# Altium PCB band.PcbDoc
Units mm, origin at the board's own origin, x right, y up, seen from the top; angles counter-clockwise.
Board outline 70 x 45 mm, 2 copper layers (Top Layer, Bottom Layer); 47 components, 35 nets, 190 pads, 43 vias.
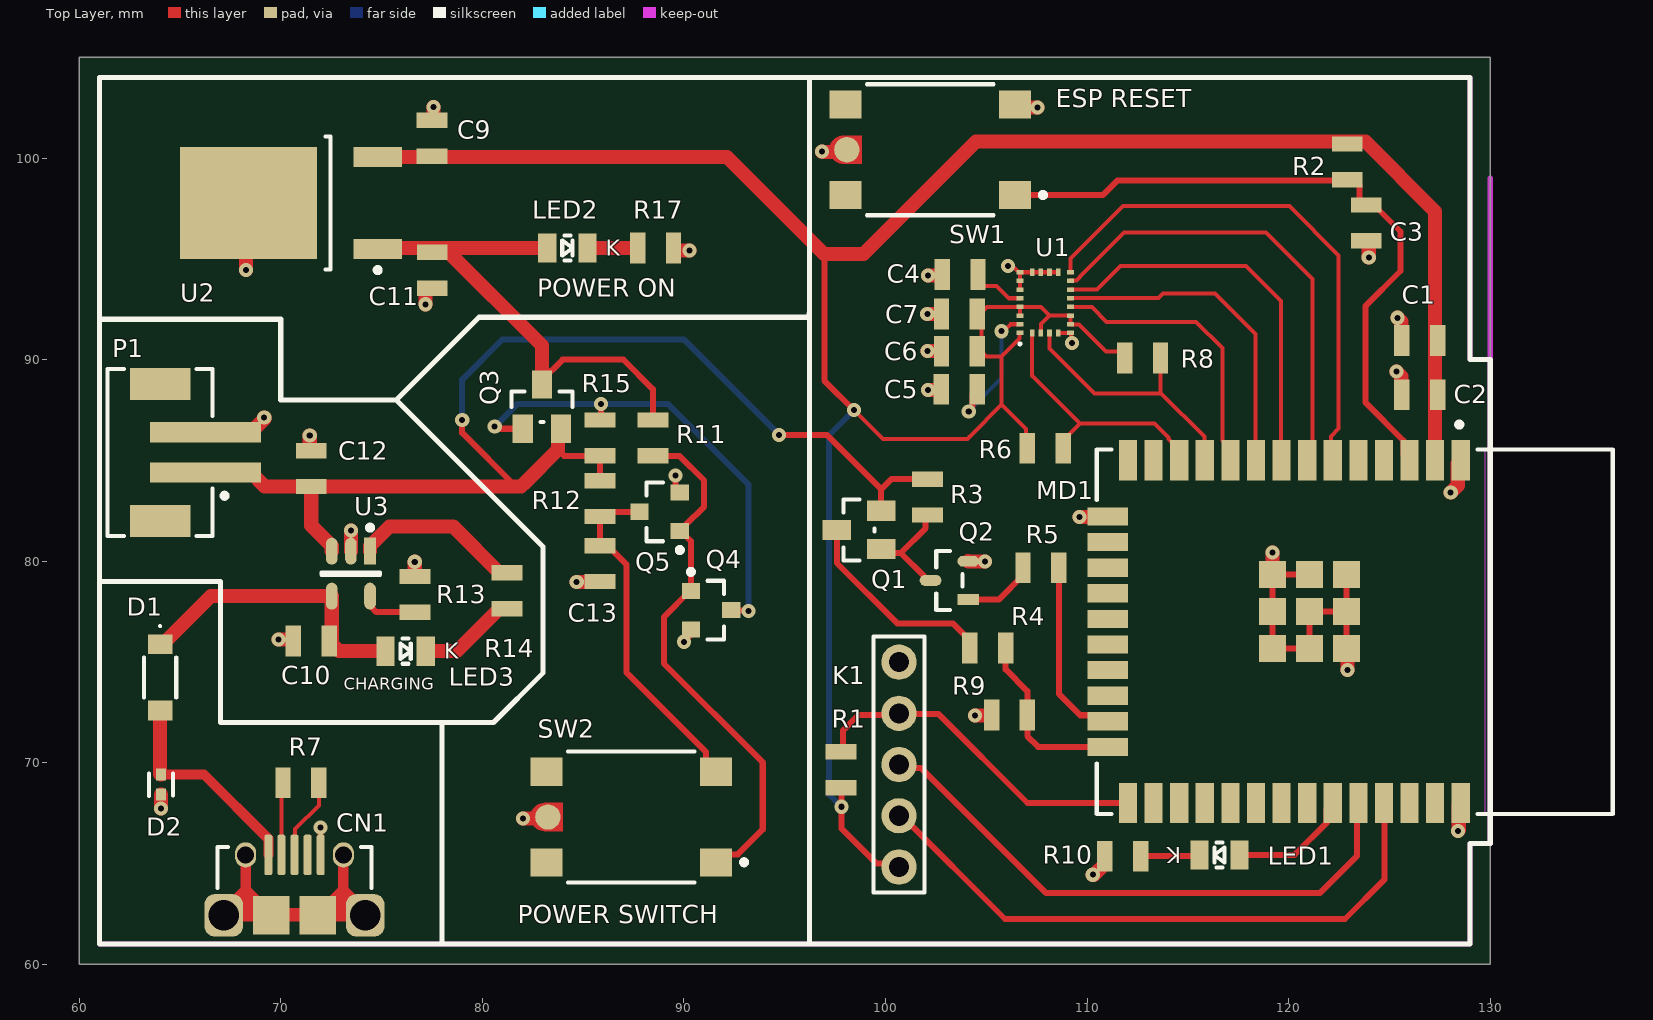
[diagram p0: Top Layer view]
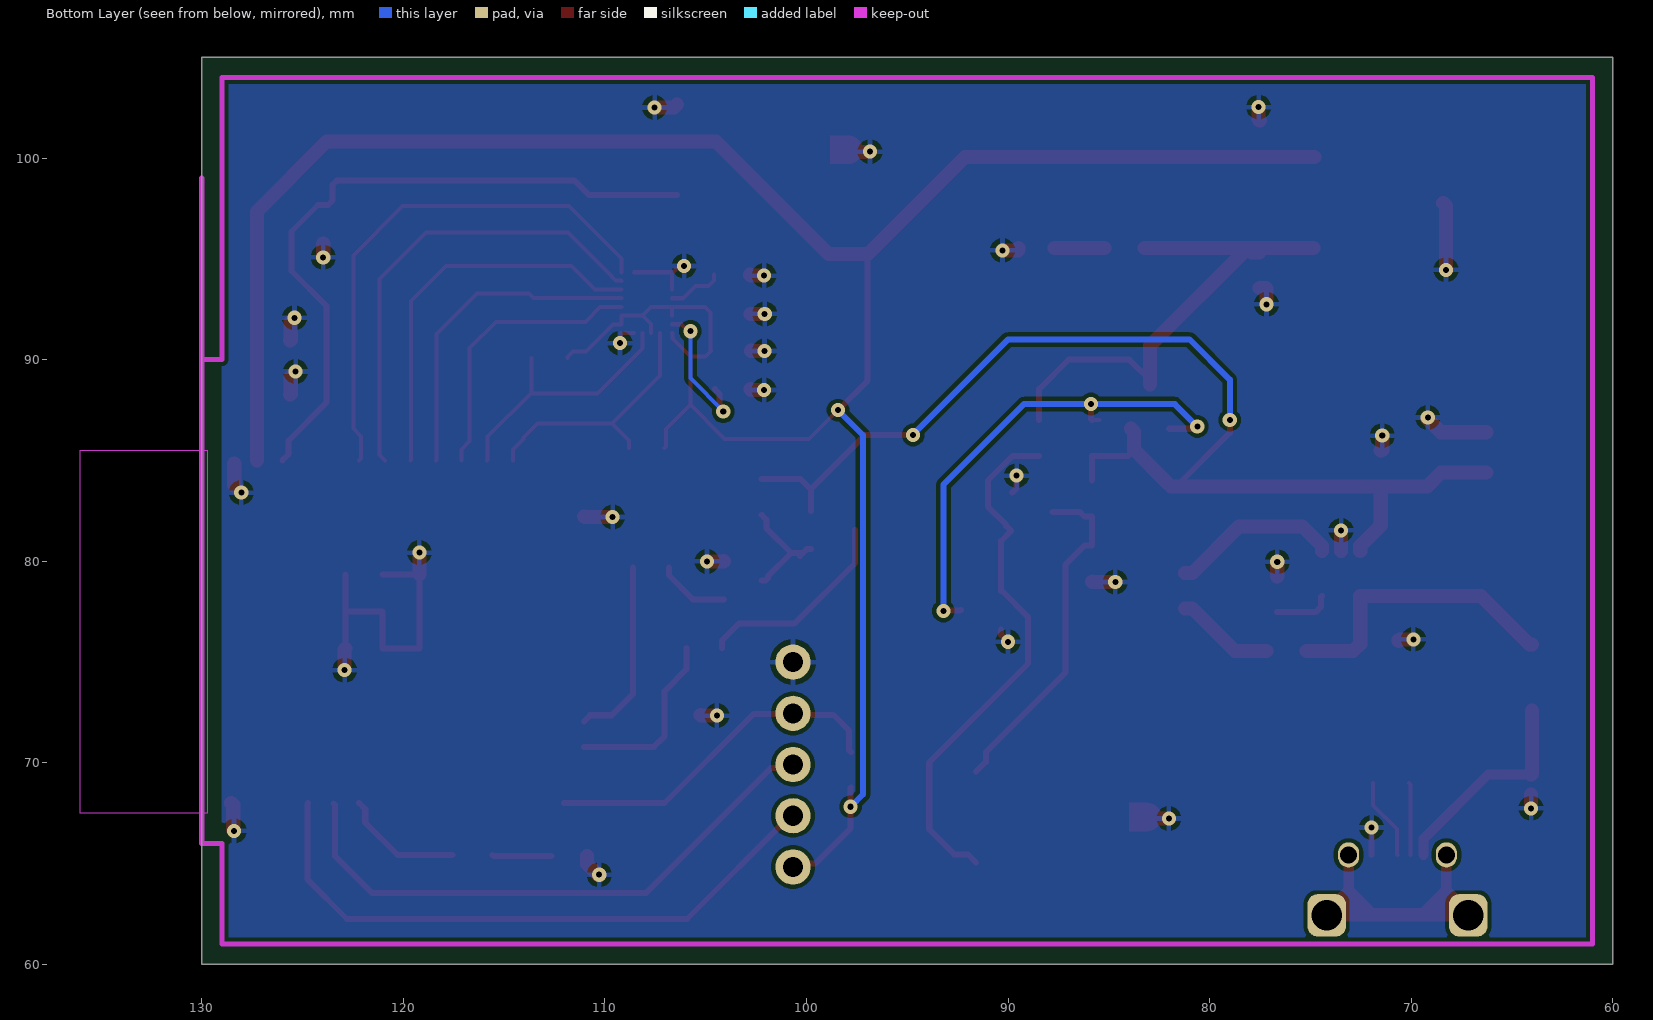
[diagram p1: Bottom Layer view, seen from below]

## Layer stack, top to bottom
Top Solder: solder mask 0.0102, Solder Resist, Dk 3.5
Top Layer: signal copper 0.0356
Dielectric 1: dielectric 0.32, FR-4, Dk 4.8
Bottom Layer: signal copper 0.0356
Bottom Solder: solder mask 0.0102, Solder Resist, Dk 3.5

## Board outline
60,60 130,60 130,105 60,105

## Design rules (kind name [scope] priority, off if disabled: settings)
Clearance [All] p1: gap=0.2 ignorepadtopadclearanceinfootprint=FALSE
HoleSize [All] p1: absolutevalues=TRUE maxlimit=5 minlimit=0.3 maxpercent=80.000 minpercent=20.000
MinimumSolderMaskSliver [All] p1: minsoldermaskwidth=0.1
PolygonConnect [All] p1: connectstyle=Relief reliefconductorwidth=0.254 reliefentries=4 polygonreliefangle="90 Angle" airgapwidth=0.254
RoutingVias [All] p1: holewidth=0.4 width=0.8 viastyle="Through Hole" minholewidth=0.3 minwidth=0.7 maxholewidth=0.7 maxwidth=1
SilkToSolderMaskClearance [IsPad] p1: minsilkscreentomaskgap=0.12 clearancetoexposedcopper=TRUE
SolderMaskExpansion [All] p1: expansion=0.102 istentingtop=FALSE
Width [All] p1: maxlimit=0.7 minlimit=0.2 preferedwidth=0.3
27 further rules are at their usual default settings.

## Components (designator, comment, footprint, x,y, rotation, side; value= is the part's Value field where it differs from the comment)
C1 "10u" C0805 126.507,90.949 r180 top
C2 "0.1u" C0805 126.507,88.261 r180 top
C3 "1u" C0805 123.852,96.779 r270 top
C4 "10n" C0805 103.699,94.223 r180 top
C5 "100n" C0805 103.658,88.535 r180 top
C6 "10u" C0805 103.666,90.416 r180 top
C7 "100n" C0805 103.666,92.26 r180 top
C9 "1u" C0805 77.506,100.984 r90 top
C10 "1u" C0805 71.508,76.042 r180 top
C11 "1u" C0805 77.518,94.437 r90 top
C12 "1u" C0805 71.508,84.593 r90 top
C13 "22u" C0805 85.834,79.878 r90 top
CN1 "microUSB" micro-USB-HRS-ZX62D-B-5PA8 70.68,64.429 r270 top
D1 "SS1040_R1_00001" SS1040_R1_00001 64.013,74.231 r270 top
D2 "TPD1E10B06DPYR" FP-DPY0002A-MFG 64.054,68.914 r90 top
K1 "H1x5" H1x5 100.668,64.829 r270 top
LED1 "LED" LED0805G 116.571,65.422 r180 top value={Value}
LED2 "LED" LED0805G 84.217,95.535 r0 top value={Value}
LED3 "LED" LED0805G 76.192,75.536 r0 top value={Value}
MD1 "ESP32-WROOM-32D" FP-ESP32-WROOM-32D-MFG 123.28,76.5 r270 top
P1 "620302124022" 620302124022 64.013,85.394 r270 top
Q1 "FDN340P" FP-527AG-MFG 98.686,81.548 r180 top
Q2 "NDS355AN" FP-527AG-01-IPC_C 103.168,79.045 r180 top
Q3 "FDN340P" FP-527AG-MFG 82.953,87.668 r90 top
Q4 "MMBTA42LT1G" ONSC-SOT-23-3-318-08_V 91.344,77.568 r0 top
Q5 "MMBTA42LT1G" ONSC-SOT-23-3-318-08_V 88.795,82.448 r180 top
R1 "10k" R0805 97.796,69.65 r90 top
R2 "10k" R0805 122.909,99.806 r90 top
R3 "100k" R0805 102.088,83.18 r270 top
R4 "2.2k" R0805 105.072,75.686 r0 top
R5 "2.2k" R0805 107.71,79.679 r180 top
R6 "10k" R0805 107.922,85.607 r180 top
R7 "0" R0805 71,69 r0 top
R8 "10k" R0805 112.755,90.077 r180 top
R9 "4.7k" R0805 106.152,72.364 r0 top
R10 "300" R0805 111.772,65.363 r180 top
R11 "100k" R0805 88.462,86.115 r90 top
R12 "100k" R0805 85.834,83.106 r90 top
R13 "2k" R0805 76.656,78.346 r270 top
R14 "47.5k" R0805 81.226,78.532 r270 top
R15 "100k" R0805 85.834,86.115 r270 top
R17 "300" R0805 88.591,95.535 r180 top
SW1 "FSM1LP" FP-FSM1LP-MFG 102.221,100.411 r180 top
SW2 "FSM1LP" FP-FSM1LP-MFG 87.39,67.306 r180 top
U1 "LSM9DS1TR" STM-LGA-24_3500X3000X1000 107.922,92.828 r90 top
U2 "LD39150DT33-R" TO-252_M 70.507,97.77 r180 top
U3 "MCP73831T-2ACI/OT" FP-C04-091-OT-IPC_B 73.477,79.379 r270 top

## Footprints (in the part's own frame and the unit in brackets; to place one, negate y for a bottom-side part, rotate by r counter-clockwise, add the part's x,y. Pads: shape width x height; smd on the part's side, far side on the other; paste and mask are expansions set on the pad)
620302124022 [mm] "2.00mm SMT Male Vertical Shrouded Header, 2p"
  rect 1x5.5 smd: 1(1,2.25) 2(-1,2.25)
  rect 1.6x3 smd: MP1(-3.4,0) MP2(3.4,0)
  silkscreen extent -4.15,-2.6 4.15,3.32, body extent -4,-2.5 4,4.51, height 6.77
C0805 [mil]
  rect 30x60 smd: 1(-35,0) 2(35,0)
  body extent -39,-25 39,24, height 31
FP-527AG-01-IPC_C [mm]
  rect 1.075x0.538 smd paste+0 mask+0: 1(-0.935,0.95)
  rrect100% 1.075x0.538 smd paste+0 mask+0: 2(-0.935,-0.95) 3(0.935,0)
  silkscreen extent -0.65,-1.46 0.65,1.46, body extent -1.57,-1.56 1.57,1.56, height 0.25
FP-527AG-MFG [mm]
  rect 1.4x1 smd paste+0 mask+0: 1(-1.1,0.95) 2(-1.1,-0.95) 3(1.1,0)
  silkscreen extent -0.76,-1.52 0.76,1.52, body extent -1.9,-1.62 1.9,1.62, height 0.25
FP-C04-091-OT-IPC_B [mm]
  rect 1.338x0.578 smd paste+0 mask+0: 1(-1.116,0.95)
  rrect100% 1.338x0.578 smd paste+0 mask+0: 2(-1.116,0) 3(-1.116,-0.95) 4(1.116,-0.95) 5(1.116,0.95)
  silkscreen extent -2.41,-1.45 0.05,1.45
FP-DPY0002A-MFG [mm]
  rect 0.6x0.5 smd paste+0 mask+0: 1(-0.5,0) 2(0.5,0)
  silkscreen extent -0.56,-0.6 0.55,0.6, body extent -0.9,-0.45 0.9,0.45, height 0.25
FP-ESP32-WROOM-32D-MFG [mm]
  rect 2x0.9 smd paste+0 mask+0: 1(-8.5,5.26) 2(-8.5,3.99) 3(-8.5,2.72) 4(-8.5,1.45) 5(-8.5,0.18) 6(-8.5,-1.09) 7(-8.5,-2.36) 8(-8.5,-3.63) 9(-8.5,-4.9) 10(-8.5,-6.17) 11(-8.5,-7.44) 12(-8.5,-8.71) 13(-8.5,-9.98) 14(-8.5,-11.25) 25(8.5,-11.25) 26(8.5,-9.98) 27(8.5,-8.71) 28(8.5,-7.44) 29(8.5,-6.17) 30(8.5,-4.9) 31(8.5,-3.63) 32(8.5,-2.36) 33(8.5,-1.09) 34(8.5,0.18) 35(8.5,1.45) 36(8.5,2.72) 37(8.5,3.99) 38(8.5,5.26)
  rect 0.9x2 smd paste+0 mask+0: 15(-5.715,-12.25) 16(-4.445,-12.25) 17(-3.175,-12.25) 18(-1.905,-12.25) 19(-0.635,-12.25) 20(0.635,-12.25) 21(1.905,-12.25) 22(3.175,-12.25) 23(4.445,-12.25) 24(5.715,-12.25)
  rect 1.33x1.33 smd paste+0 mask+0: 39(-2.835,-0.405) 39(-2.835,-2.24) 39(-2.835,-4.075) 39(-1,-0.405) 39(-1,-2.24) 39(-1,-4.075) 39(0.835,-0.405) 39(0.835,-2.24) 39(0.835,-4.075)
  Keep-Out Layer region: -9,6.45 9,6.45 9,12.75 -9,12.75
  Keep-Out Layer region: -9,6.45 9,6.45 9,12.75 -9,12.75
  silkscreen extent -10.4,-12.8 9.05,12.8, body extent -9.6,-13.35 9.6,12.9, height 0.25
FP-FSM1LP-MFG [mm]
  rect 1.6x1.395 smd paste+0 mask+0: 1(-4.205,2.248) 2(4.205,2.248) 3(-4.205,-2.248) 4(4.205,-2.248)
  round 1.26 smd paste+0 mask+0: 5(4.139,0)
  Top Layer region: 3.405,0.7 4.307,0.7 4.574,0.647 4.801,0.496 4.952,0.269 5.005,0.002 5.005,0.002 5.005,-0.002 4.952,-0.269 4.801,-0.496 4.574,-0.647 4.307,-0.7 4.307,-0.7 3.405,-0.7
  silkscreen extent -5.72,-3.25 3.15,3.25, body extent -5.1,-3.35 5.11,3.35, height 0.25
H1x5 [mm]
  round 1.75 hole 1: 1(0,0) 2(-2.54,0) 3(-5.08,0) 4(-7.62,0) 5(-10.16,0)
  silkscreen extent -11.43,-1.27 1.27,1.27, body extent -11.43,-1.27 1.27,1.27, height 8.4
LED0805G [mm] "LED SMD 0805 GREEN"
  rect 0.9x1.45 smd: 1(-1,0) 2(1,0)
  silkscreen extent -0.25,-0.63 0.25,0.63, body extent -0.99,-0.64 1.04,0.64, height 1.13
micro-USB-HRS-ZX62D-B-5PA8 [mm]
  rrect100% 1.25x1.05 hole 0.85: 0(-1,2.425) 0(-1,-2.425)
  rrect50% 2.1x1.9 hole 1.5: 0(2,3.512) 0(2,-3.512)
  rect 1.9x1.8 smd: 0(2,1.15) 0(2,-1.15)
  rrect50% 2x0.4 smd: 1(-1,-1.3) 2(-1,-0.65) 3(-1,0) 4(-1,0.65) 5(-1,1.3)
  Top Layer region: -1.016,-2.159 0.635,-2.159 1.651,-1.143 1.651,1.143 0.635,2.159 -1.016,2.159 -1.016,2.667 0.635,2.667 1.524,3.556 2.286,3.556 2.286,-3.556 1.524,-3.556 0.635,-2.667 -1.016,-2.667
  silkscreen extent -1.4,-3.81 0.64,3.81, body extent -1.11,-4.1 4.32,4.1, height 2.68
ONSC-SOT-23-3-318-08_V [mm] "SOT23, 3-Leads, Body 2.92x1.3mm, Pitch 0.95mm"
  rect 0.9x0.8 smd: 1(-1,0.95) 2(-1,-0.95) 3(1,0)
  silkscreen extent -1.12,-1.46 0.65,2.02, body extent -0.65,-1.46 0.65,1.46, height 1.11
R0805 [mil]
  rect 30x60 smd: 1(-35,0) 2(35,0)
  body extent -39,-25 39,24, height 31
SS1040_R1_00001 [mm]
  rect 0.97x1.22 smd: 1(-1.64,0) 2(1.64,0)
  silkscreen extent -2.6,-0.8 1,0.8, body extent -2.03,-0.8 2.03,0.8, height 1.45
STM-LGA-24_3500X3000X1000 [mm] "LGA, 24-Leads, Body 3.65x3.15mm, Pitch 0.43mm"
  rect 0.23x0.35 smd mask+0.05: 1(-1.505,1.25) 6(-1.505,-1.25) 7(-1.075,-1.25) 8(-0.645,-1.25) 9(-0.215,-1.25) 10(0.215,-1.25) 11(0.645,-1.25) 12(1.075,-1.25) 13(1.505,-1.25) 18(1.505,1.25) 19(1.075,1.25) 20(0.645,1.25) 21(0.215,1.25) 22(-0.215,1.25) 23(-0.645,1.25) 24(-1.075,1.25)
  rect 0.35x0.23 smd mask+0.05: 2(-1.505,0.645) 3(-1.505,0.215) 4(-1.505,-0.215) 5(-1.505,-0.645) 14(1.505,-0.645) 15(1.505,-0.215) 16(1.505,0.215) 17(1.505,0.645)
  silkscreen extent -2.11,1.19 -1.98,1.31, body extent -1.82,-1.57 1.83,1.58, height 1.03
TO-252_M [mm] "D-PAK, 4-Leads, Body 6.1x6.5mm, Pitch 2.28mm, Lead Span 9.7mm, IPC Low Density"
  rect 2.4x1 smd: 1(-4.3,2.28) 3(-4.3,-2.28)
  rect 6.8x5.55 smd: 4(2.1,0)
  silkscreen extent -4.43,-3.3 -1.7,3.45, body extent -1.95,-3.3 4.25,3.3, height 2.4

## Part data
C1 C2 C3 C4 C5 C6 C7 C9 C10 C11 C12 C13: library part C, "Capacitor"
CN1: library part "microUSB-B-socket (HIROSE ZX62D-B-5PA8)", "micro USB-B socket (HIROSE ZX62D-B-5PA8)", Supplier Part Number 1=2300438, ComponentLink1Description=http://www.farnell.com/datasheets/1693470.pdf, ComponentLink1URL=http://www.farnell.com/datasheets/1693470.pdf, Supplier 1=Farnell
D1: "Schottky Diode", Manufacturer_Name=PANJIT, Height=1.35mm, Manufacturer_Part_Number=SS1040_R1_00001
D2: library part CMP-0326-00004-4, "TVS DIODE 5.5V 14V 2X1SON", Breakdown Voltage=6V, Capacitance=12pF, Case/Package=0402, Clamping Voltage=14V, Leakage Current=100nA, Max Operating Temperature=125°C, Min Operating Temperature=-40°C, Package Quantity=1, Peak Pulse Current=5A, Peak Pulse Power=90W, Power Line Protection=No, Reverse Standoff Voltage=5.5V, Test Current=1mA, Composition=Zener, Contact Plating=Gold, Direction=Bidirectional, Element Configuration=Single, ESD Protection=Yes, Height=0.35mm, Interface=GPIO, Lead Free="Lead Free", Length=1.1mm, Max Reverse Leakage Current=100nA, Min Breakdown Voltage=6V, Number of Bidirectional Channels=1, Number Of Channels=1, Number of Pins=2, Packaging="Tape and Reel", Radiation Hardening=No, REACH SVHC="No SVHC", Width=0.7mm, Working Voltage=5.5V
K1: "Header 1x5 (male)"
MD1: library part CMP-194065-000003-1, "WIFI MODULE 32MBITS SPI FLASH", Manufacturer="Espressif Systems", Max Frequency=2484MHz, Max Supply Voltage=3.6V, Min Supply Voltage=3V, Nominal Supply Current=500mA, Temperature="-40°C to +85°C", Temperature Range High=+85°C, Temperature Range Low=-40°C, Automotive=No, Bandwidth=72MHz, Category=UNK, ComponentLink2Description=Datasheet, ComponentLink2URL=https://www.espressif.com/sites/default/files/documentation/esp32-wroom-32d_esp32-wroom-32u_datasheet_en.pdf, Data Rate=150Mbits/s, Device Class L1="Integrated Circuits (ICs)", Device Class L2="RF Semiconductors and Devices", Device Class L3=Transceivers, Digikey Description="WIFI MODULE 32MBITS SPI FLASH", Height=3.2mm, Interface=I2C,SPI,UART,Ethernet,I2S,Other, Lead Free=Yes, Manufacturer Part Number=ESP32-WROOM-32D, Mouser Description="Wi-Fi/BT BLE Module ESP32-D0WD, SPI Flash, UART, P", Number Of Adc Channels=16, Number Of Gpio=32, Octopart=https://octopart.com/esp32-wroom-32d-espressif+systems-91040050, Package=ESP32-WROOM-32D, RoHS=TRUE, Sensitivity=-98dBm
P1: library part CMP-1502-00660-1, "Male Shrouded Header WR-WTB, SMT, Vertical, pitch 2 mm, 1 x 2 position", Contact Resistance=20mOhm, Manufacturer="Wurth Elektronik", Operating Temperature=-25to85degC, Working Voltage=100VAC, Datasheet URL=https://katalog.we-online.de/em/datasheet/6203xx124022.pdf, Gender=Male, Manufacturer URL=http://www.we-online.de, Mounting Technology=SMT, Orientation=Vertical, Package Reference=620302124022, Packaging=TapeandReel, Part Number=620302124022, Pitch=2mm, Position=1x2, Publisher=WurthElektronik
Q1 Q3: library part CMP-2100-03638-2, "MOSFET P-CH 20V 2A SSOT3", Case/Package=SOT-23, Continuous Drain Current (ID)=2A, Current Rating=-2A, Drain to Source Breakdown Voltage=-20V, Drain to Source Resistance=60mR, Drain to Source Voltage (Vdss)=20V, Gate to Source Voltage (Vgs)=8V, Input Capacitance=779pF, Max Operating Temperature=150°C, Max Power Dissipation=500mW, Min Operating Temperature=-55°C, On-State Resistance=70MR, Package Quantity=1, Threshold Voltage=-800mV, Contact Plating=Tin, Dual Supply Voltage=-20V, Element Configuration=Single, Fall Time=11ns, Height=0.94mm, Lead Free="Lead Free", Length=2.92mm, Mount="Surface Mount", Nominal Vgs=-800mV, Number of Elements=1, Number of Pins=3, Packaging="Tape and Reel", Power Dissipation=500mW, Radiation Hardening=No, Rds On Max=70mR, REACH SVHC="No SVHC", Rise Time=9ns, Termination=SMD/SMT, Turn-Off Delay Time=27ns, Turn-On Delay Time=10ns, Voltage Rating (DC)=-20V, Weight=0.03g, Width=3.05mm
Q2: library part CMP-2000-06834-2, "MOSFET N-CH 30V 1.7A SSOT3", Continuous Drain Current=1.7A, Drain to Source Breakdown Voltage=30V, Drain to Source Resistance=0.105Ω, Gate To Source Voltage=20V, Input Capacitace At Vds="195pF @ 15V", Manufacturer="ON Semiconductor", Max Forward Diode Voltage=1.2V, Max Junction Temp=+150°C, Package=527AG-01, Power Dissipation=0.46W, Pulse Drain Current=10A, Temperature="-55°C to +150°C", Temperature Range Low=-55°C, Typ Forward Diode Voltage=0.8V, Automotive=No, Category=Trans, ComponentLink2Description=Datasheet, ComponentLink2URL=https://www.onsemi.com/pub/Collateral/NDS355AN-D.PDF, Depletion Mode=False, Device Class L1="Discrete Semiconductors", Device Class L2=Transistors, Device Class L3=MOSFETs, Digikey Description="MOSFET N-CH 30V 1.7A SSOT3", Drain To Source Voltage=30V, Footprint Url=https://www.onsemi.com/pub/Collateral/527AG.PDF, Gate Charge At Vgs="3.5nC @ 5V", Height=1.22mm, Lead Free=Yes, Manufacturer Part Number=NDS355AN, Mouser Description="MOSFET SOT-23 N-CH LOGIC", Number Of Channels=1, Number Of N Channels=1, Octopart=https://octopart.com/nds355an-on+semiconductor-84330922, RoHS=TRUE, Rthja Max=250°C/W, Standoff Height=0.013mm, Temperature Range High=+150°C, Threshold Vgs Max=2V, Threshold Vgs Min=1V, Transconductance=3.5S, Turn Off Delay Time=13ns, Turn On Delay Time=10ns
Q4 Q5: library part CMP-1048-00662-1, "High Voltage Transistor, NPN Silicon, 3-Pin SOT-23, Pb-Free, Tape and Reel", Manufacturer="On Semiconductor", ComponentLink1Description="Manufacturer URL", ComponentLink1URL=http://www.onsemi.com/, ComponentLink2Description=Datasheet, ComponentLink2URL=http://www.onsemi.cn/pub_link/Collateral/MMBTA42LT1-D.PDF, ComponentLink3Description="Package Specification", ComponentLink3URL=http://www.onsemi.cn/pub_link/Collateral/318-08.PDF, DatasheetVersion="Rev. 12", fT Min (MHz)=50, IC Continuous (A)=0.5, Mounting Technology="Surface Mount", PackageDescription="3-Pin Small Outline Transistor, Body 2.92 x 1.3 mm, Pitch 0.95 mm", PackageReference=SOT-23-3-318-08, PackageVersion="Rev. AP, 11/2009", Packing="Tape and Reel", PartNumber=MMBTA42LT1G, Polarity=NPN, RoHS=TRUE
R1 R2 R3 R4 R5 R6 R7 R8 R9 R10 R11 R12 R13 R14 R15 R17: library part R, "R"
SW1 SW2: library part CMP-03402-000015-1, "SWITCH TACTILE SPST-NO 0.05A 24V", Actuator Color=Black, Contact Current Rating=50mA, Contact Resistance=100mR, Max Operating Temperature=85°C, Max Voltage Rating (DC)=12V, Min Operating Temperature=-35°C, Operating Force=1.57N, Package Quantity=2000, Actuator Length=0.01inch, Actuator Material=Polyphthalamide, Actuator Type=Standard, Contact Material="Copper Alloy", Contact Plating=Silver, Current Rating=50mA, Depth=8mm, Electrical Life=100000Cycles, ELV=Compliant, Illumination Type=Non-Illuminated, Lead Free="Lead Free", Length=6.19mm, Max Current Rating=50mA, Mechanical Life=100000Cycles, Mount="Surface Mount", Orientation=Straight, Packaging="Loose Piece", REACH SVHC="No SVHC", RoHS Compliant=Yes, Series=FSM1LP, Switch Function=Off-Mom, Switch Travel=0.25mm, Termination="Gull Wing", Throw Configuration=SPST, Type=Switch, Voltage Rating (DC)=12V
U1: library part CMP-2000-06606-1, "iNEMO Inertial Module: 3D Accelerometer, 3D Gyroscope, 3D Magnetometer, 1.9 to 3.6 V, -40 to 85 degC, 24-Pin LGA, RoHS, Tape and Reel", Manufacturer=STMicroelectronics, Package Description="24-Pin Plastic Land Grid Array Package, Body 3.65 x 3.15 mm, Pitch 0.43 mm", Package Reference=LGA-24_3500X3000X1000, PartNumber=LSM9DS1, Sensor Case Style=LGA, Supply Voltage Max=3.6V, Supply Voltage Min=1.9V, Acceleration Range=±2g,±4g,±8g,±16g, Datasheet URL=http://www2.st.com/content/ccc/resource/technical/document/datasheet/1e/3f/2a/d6/25/eb/48/46/DM00103319.pdf/files/DM00103319.pdf/jcr:content/translations/en.DM00103319.pdf, Datasheet Version="Rev. 3, 03/2015", Gyroscope Range=±245°/s,±500°/s,±2000°/s, Manufacturer URL=http://www.st.com/, MEMS Module Function=Tri-AxisGyroscope,Tri-AxisAccelerometer,Tri-AxisMagnetometer, Mounting Technology=SurfaceMount, MSL=MSL3-168hours, No. of Pins=24Pins, Packaging=CutTape, Product Range=-, SVHC=NoSVHC(17-Dec-2015)
U2: library part CMP-0244-00082-1, "Ultra Low Drop BICMOS Voltage Regulator, 3.3V, 3-Pin DPAK, Tape and Reel", ComponentLink1Description="Manufacturer URL", ComponentLink1URL=http://www.st.com, ComponentLink2Description=Datasheet, ComponentLink2URL=http://www.st.com/internet/com/TECHNICAL_RESOURCES/TECHNICAL_LITERATURE/DATASHEET/CD00150601.pdf, DatasheetVersion=1/01/2009, PackageDescription="3-Pin Transistor Outline Package 2.28 mm Pitch, 9.7 mm Lead Span (DPAK)", PackageReference=TO-252, PackageVersion=2011
U3: library part CMP-0133-00143-2, "IC CONTROLLR LI-ION 4.2V SOT23-5", Case/Package=SOT-23, Drain to Source Resistance=350mR, Max Charge Current=500mA, Max Input Voltage=6V, Max Operating Temperature=85°C, Max Output Voltage=4.5V, Max Power Dissipation=1.54W, Min Operating Temperature=-40°C, Min Output Voltage=4.168V, Min Supply Voltage=3.75V, Output Voltage=4.2V, Voltage Rating=4.534V, Contact Plating=Tin, Height=0.051inch, Lead Free="Lead Free", Length=0.122inch, Max Supply Voltage=6V, Mount="Surface Mount", Number of Cells=1, Number Of Channels=1, Number of Outputs=1, Number of Pins=5, Output Current=500mA, Packaging="Tape and Reel", Radiation Hardening=No, REACH SVHC="No SVHC", Termination=SMD/SMT, Weight=0.00709oz, Width=0.071inch

## Via types
v1: diameter 0.7, hole 0.3, Top Layer to Bottom Layer, 43 vias

## Nets (pads, with @x,y where several pads share a name; then routed paths per layer and width w, separated by ;. In a path a pad name is that pad's centre, name@x,y a point inside that pad or via, vN(x,y) a via of type N, cw(c..) or ccw(c..) an arc to the next point about the centre after c; other vN are vias at no path point)
+3V3: C1.1 C2.1 C6.1 C7.1 C9.1 K1.1 MD1.2 R1.1 R2.2 R6.2 R8.2 U1.1 U1.3 U1.7 U1.8 U1.22 U1.23 U2.3 | length 133.3
  Top Layer w0.2: v1(98.435,87.493) 99.868,86.061 104.063,86.061 104.18,86.178 104.18,86.194 105.749,87.763 ; U1.1 106.656,91.323 106.641,91.308 106.641,91.04 105.749,90.148 ; U1.23 U1.22 ; R6.2 106.961,85.679 106.961,86.552 105.749,87.763 ; U1.3 107.722,91.338 107.722,91.76 108.145,92.183 ; R8.2 111.866,90.124 111.585,90.405 110.931,90.405 109.598,91.738 109.187,91.738 U1.7 U1.8 108.145,92.183 ; 105.749,87.763 105.749,90.148 ; 105.749,90.148 105.018,90.148 104.737,90.429 104.737,90.433 104.755,90.451 104.755,92.332 105.036,92.613 U1.22 ; U1.22 107.715,92.613 108.145,92.183
  Top Layer w0.3: 96.967,95.228 96.967,88.961 v1(98.435,87.493) ; R1.1 97.812,68.745 v1(97.812,67.816) 97.812,66.742 99.56,64.995 100.502,64.995 K1.1
  Top Layer w0.7: U2.3 75.507,100.05 92.145,100.05 96.955,95.24 98.913,95.24 104.488,100.815 122.909,100.815 123.81,100.815 127.27,97.355 127.27,94.602 127.27,90.502 127.27,87.91 MD1.2
  Bottom Layer w0.3: v1(97.812,67.816) 97.203,68.425 97.203,86.26 v1(98.435,87.493)
+VBAT: C12.1 P1.1 Q1.2 Q3.2 R3.1 R12.2 R15.2 U3.3 | length 61.5
  Top Layer w0.3: v1(79,87) 79,86.369 81.665,83.704 ; 83.753,85.533 84.061,85.226 R15.2 R12.2 ; v1(94.709,86.262) 97.09,86.262 99.786,83.566 ; Q1.2 99.786,83.566 ; R3.1@102.221,84.069 100.289,84.069 99.786,83.566
  Top Layer w0.7: P1.1 68.513,84.394 69.203,83.704 C12.1 ; U3.3 72.527,80.753 71.508,81.772 C12.1 ; Q3.2 83.753,86.418 83.753,85.533 82.11,83.89 81.924,83.704 C12.1
  Bottom Layer w0.3: v1(79,87) 79,89 81,91 90,91 94.709,86.291 v1(94.709,86.262)
ADC: MD1.24 R4.2 R9.2 | length 9
  Top Layer w0.3: R4.2 105.961,74.635 107.041,73.555 107.041,71.315 107.571,70.785 MD1.24
AG_DATA_EN: MD1.6 U1.13 | length 26.5
  Top Layer w0.2: U1.13 109.172,95.017 111.778,97.623 120.038,97.623 122.485,95.175 122.485,86.571 122.097,86.183 122.097,85.093 MD1.6
AG_INT1: MD1.8 U1.11 | length 19.6
  Top Layer w0.2: U1.11 109.187,93.488 110.499,93.488 111.662,94.651 117.886,94.651 119.632,92.906 119.632,85.018 MD1.8
AG_INT2: MD1.7 U1.12 | length 23.1
  Top Layer w0.2: U1.12 109.187,93.918 109.471,93.918 109.647,94.093 109.647,94.124 111.826,96.302 118.887,96.302 121.188,94.001 121.188,85.268 MD1.7
BATTERY_STATE: MD1.23 R5.1 | length 9.3
  Top Layer w0.3: R5.1 108.599,73.417 109.661,72.355 110.73,72.355 MD1.23
DOUT: LED1.1 MD1.33 | length 6.1
  Top Layer w0.3: LED1.1 120.287,65.422 121.89,67.025 121.89,67.7 MD1.33
GND: C1.2 C2.2 C3.2 C4.2 C5.2 C6.2 C7.2 C9.2 C10.2 C11.1 C12.2 C13.1 CN1.5 D2.1 K1.5 MD1.1 MD1.15 MD1.38 MD1.39 P1.2 Q2.2 Q4.2 Q5.2 R9.1 R10.2 R13.1 R17.1 SW1.3 SW1.5 SW2.5 U1.5 U1.6 U1.14 U1.15 U1.16 U1.17 U1.18 U1.19 U1.20 U2.4 U3.2 | length 56.6
  Top Layer w0.2: v1(106.07,94.641) 106.166,94.546 106.399,94.546 106.612,94.333 U1.18 ; U1.20 U1.19 U1.18 ; U1.5 U1.6 109.196,91.323 109.211,91.308 109.211,90.854 v1(109.251,90.815) ; U1.14 U1.15 U1.16 U1.17 U1.18
  Top Layer w0.3: D2.1@64.053,68.413 D2.1 ; v1(71.965,66.785) 71.973,66.777 71.973,65.436 CN1.5 ; C13.1@85.822,78.976 C13.1 ; v1(89.576,84.243) 89.576,83.617 Q5.2 ; v1(90,76) 90.344,76.344 Q4.2 ; C6.2@102.75,90.443 C6.2 ; MD1.39@121.04,79.335 119.205,79.335 119.205,77.5 119.205,75.665 121.04,75.665 121.04,77.5 MD1.39@122.875,77.5 ; MD1.39@122.875,75.665 MD1.39@122.875,77.5 ; MD1.39@122.875,79.335 MD1.39@122.875,77.5 ; C3.2 C3.2@123.977,95.765 ; MD1.1@128.39,84.85 MD1.1
  Top Layer w0.7: v1(64.052,67.739) 64.052,68.412 D2.1@64.053,68.413 ; P1.2 68.513,86.394 69.176,87.058 v1(69.176,87.128) ; v1(68.27,94.454) 68.27,97.633 U2.4 ; v1(69.89,76.121) 70.588,76.121 70.619,76.09 C10.2 ; v1(71.437,86.226) 71.437,85.513 71.468,85.482 C12.2 ; U3.2 U3.2 v1(73.478,81.528) ; v1(76.645,79.969) 76.645,79.247 R13.1 ; v1(77.179,92.743) 77.179,93.517 77.21,93.548 C11.1 ; C9.2 77.538,101.873 77.569,101.904 v1(77.569,102.524) ; v1(82.023,67.231) 83.176,67.231 SW2.5 ; v1(84.68,78.964) 85.809,78.964 C13.1@85.822,78.976 ; R17.1 89.48,95.449 89.511,95.418 v1(90.273,95.418) ; v1(96.852,100.316) 96.86,100.308 97.979,100.308 SW1.5 ; v1(102.073,92.267) 102.77,92.267 C7.2 ; v1(102.083,90.428) 102.746,90.428 102.75,90.432 C6.2@102.75,90.443 ; v1(102.101,94.167) 102.779,94.167 102.81,94.198 C4.2 ; v1(102.105,88.493) 102.738,88.493 102.769,88.524 C5.2 ; Q2.2 104.112,79.986 v1(104.934,79.986) ; v1(104.443,72.339) 105.238,72.339 R9.1 ; SW1.3 106.574,102.51 v1(107.535,102.51) ; v1(109.617,82.191) 111.006,82.191 MD1.15 ; v1(110.283,64.445) 110.346,64.445 110.883,64.982 R10.2 ; MD1.39@119.205,79.335 119.208,79.338 v1(119.208,80.425) ; MD1.39@122.875,75.665 122.913,75.627 v1(122.913,74.591) ; v1(123.977,95.074) C3.2@123.977,95.765 ; v1(125.346,89.408) 125.587,89.167 125.587,88.292 C2.2 ; v1(125.403,92.074) 125.587,91.89 125.587,90.98 C1.2 ; v1(128.041,83.402) 128.39,83.751 MD1.1@128.39,84.85 ; v1(128.393,66.616) 128.44,66.664 128.44,67.9 MD1.38
I2C_SCL: MD1.12 R6.1 U1.2 | length 13.1
  Top Layer w0.2: U1.2 107.277,89.199 109.643,86.833 ; R6.1 108.811,85.988 109.643,86.819 109.643,86.833 ; MD1.12 114.57,85.55 114.05,86.07 114.05,86.124 113.341,86.833 109.643,86.833
I2C_SDA: MD1.11 R8.1 U1.4 | length 13.2
  Top Layer w0.2: U1.4 108.137,90.558 110.366,88.329 113.671,88.329 ; R8.1 113.644,88.356 113.671,88.329 ; MD1.11 115.817,85.023 115.817,86.183 113.671,88.329
LATCH_OUT: C11.2 LED2.1 Q3.3 R11.2 U2.1 | length 25.6
  Top Layer w0.3: Q3.3@82.953,88.968 83.985,90 87,90 88.462,88.538 R11.2
  Top Layer w0.7: U2.1@74.852,95.535 C11.2@78.204,95.535 ; C11.2 C11.2@77.899,95.326 ; Q3.3 82.953,88.968 82.953,90.695 78.159,95.49 C11.2@78.204,95.535 ; LED2.1 C11.2@78.204,95.535
M_DATA_RDY: MD1.10 U1.9 | length 14.1
  Top Layer w0.2: U1.9 109.187,92.598 110.234,92.598 110.961,91.871 115.408,91.871 116.707,90.571 116.707,85.953 117.11,85.55 MD1.10
M_INT: MD1.9 U1.10 | length 16.4
  Top Layer w0.2: U1.10 109.187,93.058 113.535,93.058 113.761,93.284 116.353,93.284 118.358,91.279 118.358,85.022 MD1.9
NetC3_1: C3.1 MD1.3 R2.1 SW1.1 | length 33.9
  Top Layer w0.3: SW1.1 110.787,98.163 111.507,98.883 123.312,98.883 123.509,98.686 123.509,97.899 123.74,97.668 124.233,97.668 125.548,96.353 125.548,94.395 123.802,92.649 123.802,87.878 125.7,85.981 125.7,85.3 MD1.3
NetC4_1: C4.1 U1.21 | length 2.7
  Top Layer w0.2: C4.1 104.588,93.935 104.869,93.654 105.511,93.654 106.122,93.043 U1.21
NetC5_1: C5.1 U1.24 | length 7
  Top Layer w0.2: v1(105.762,91.408) 105.853,91.408 106.197,91.753 U1.24
  Top Layer w0.3: v1(104.13,87.417) 104.13,87.525 104.316,87.712 104.316,88.304 C5.1
  Bottom Layer w0.2: v1@104.091,87.408 105.762,89.079 v1(105.762,91.408)
NetC13_2: C13.2 Q5.3 R12.1 SW2.3 | length 17.3
  Top Layer w0.3: Q5.3 86.447,82.448 86.215,82.217 R12.1 C13.2 86.215,80.767 87.157,79.825 87.157,74.468 91.099,70.525 91.099,70.049 SW2.3
NetCN1_1: CN1.1 D1.2 D2.2 | length 10.6
  Top Layer w0.5: D2.2 66.195,69.414 69.38,66.229 CN1.1
  Top Layer w0.7: D1.2 64.013,69.455 D2.2
NetCN1_2: CN1.2 R7.1 | length 3.6
  Top Layer w0.2: CN1.2 70.03,68.919 R7.1
NetCN1_3: CN1.3 R7.2 | length 4.1
  Top Layer w0.2: CN1.3 70.711,65.46 70.711,66.71 71.889,67.888 R7.2
NetLED1_K: LED1.2 R10.1 | length 2.9
  Top Layer w0.3: R10.1 115.512,65.363 LED1.2
NetLED2_K: LED2.2 R17.2 | length 2.5
  Top Layer w0.7: LED2.2 R17.2
NetLED3_K: LED3.2 R14.2 | length 4.9
  Top Layer w0.7: LED3.2 78.738,75.536 80.845,77.643 R14.2
NetQ1_1: Q1.1 Q2.3 R3.2 | length 6.1
  Top Layer w0.3: Q1.1 Q1.1@99.986,80.598 ; Q1.1@100.327,80.258 Q1.1@100.179,80.406 ; R3.2@102.221,82.291 101.99,82.06 101.99,81.635 100.761,80.406 ; Q2.3 102.029,79.045 101.919,79.155 101.919,79.248 100.761,80.406 ; Q1.1@99.986,80.598 Q1.1@100.179,80.406 ; Q1.1@99.986,80.598 Q1.1@100.179,80.406 ; Q1.1@100.179,80.406 100.327,80.406 100.761,80.406
NetQ1_3: Q1.3 R4.1 | length 10.2
  Top Layer w0.3: Q1.3 97.586,79.91 100.584,76.912 103.338,76.912 104.183,76.067 R4.1
NetQ2_1: Q2.1 R5.2 | length 3.6
  Top Layer w0.3: Q2.1 105.618,78.095 106.821,79.298 R5.2
NetQ3_1: Q3.1 Q4.3 R15.1 | length 24.5
  Top Layer w0.2: R15.1@85.453,87.004 R15.1
  Top Layer w0.3: v1(80.612,86.678) 80.722,86.568 Q3.1 ; R15.1 85.892,87.062 v1(85.892,87.8) ; Q4.3 92.364,77.548 93.19,77.548 v1(93.21,77.527)
  Bottom Layer w0.3: v1(80.612,86.678) 81.724,87.79 84.042,87.79 84.053,87.8 v1(85.892,87.8) 89.2,87.8 93.21,83.79 v1(93.21,77.527)
NetQ4_1: Q4.1 Q5.1 R11.1 SW2.1 | length 26.7
  Top Layer w0.3: R11.1 89.774,85.226 91,84 91,82.704 90.095,81.798 90.095,81.748 89.845,81.498 90.344,80.999 Q4.1 90.294,78.518 89,77.224 89,74.925 93.911,70.014 93.911,66.695 92.669,65.453 91.989,65.453 SW2.1
NetR13_2: R13.2 U3.5 | length 2.8
  Top Layer w0.3: U3.5 74.48,78.21 74.48,77.728 74.742,77.467 R13.2@76.647,77.467
NetR14_1: R14.1 U3.1 | length 8.4
  Top Layer w0.7: U3.1 74.427,80.753 75.385,81.711 78.555,81.711 80.845,79.421 R14.1
RST: K1.4 MD1.25 R1.2 | length 17.4
  Top Layer w0.3: R1.2 97.884,70.626 97.884,71.594 98.662,72.371 100.59,72.371 K1.4 100.69,72.427 102.616,72.427 107.043,68 MD1.25
RX: K1.3 MD1.34 | length 28.8
  Top Layer w0.3: K1.3 100.845,69.732 101.764,69.732 107.967,63.529 121.545,63.529 123.401,65.384 123.401,67.912 MD1.34@123.474,67.986
TX: K1.2 MD1.35 | length 30.8
  Top Layer w0.3: K1.2 100.809,67.369 105.93,62.248 122.796,62.248 124.752,64.203 124.752,67.978 MD1.35
VPP: C10.1 D1.1 LED3.1 U3.4 | length 14.7
  Top Layer w0.7: D1.1 64.138,75.871 66.53,78.263 U3.4 72.527,75.893 72.884,75.536 LED3.1
pads on no net: CN1.0 CN1.4 MD1.4 MD1.5 MD1.13 MD1.14 MD1.16 MD1.17 MD1.18 MD1.19 MD1.20 MD1.21 MD1.22 MD1.26 MD1.27 MD1.28 MD1.29 MD1.30 MD1.31 MD1.32 MD1.36 MD1.37 P1.MP1 P1.MP2 SW1.2 SW1.4 SW2.2 SW2.4

## Polygon pours and split planes (outlines as drawn)
GND on Bottom Layer "GND_L02_P000" (solid, pour order 0): 61,104 129,104 129,61 61,61

## Keep-outs
Keep-Out Layer:
  lines w0.254: 129,99 129,104 ; 130,90 129,90 129,104 ; 130,92 130,66 ; 130,99 130,66 ; 129,104 61,104 61,61 129,61 129,66 130,66

## Silkscreen, mask and mechanical layers (free items; w line width, h text height)
Top Overlay:
  lines w0.254: 96.223,92.576 96.21,92.101 79.827,92.101 75.726,88 ; 98,61 96,61 78,61 ; 61,79 61,92 ; 61,79 61,61 78,61 ; 61,79 67,79 67,72 78,72 ; 61,92 61,104 96.234,104 ; 61,92 70,92 70,88 75.726,88 ; 75.726,88 83,80.726 83,74.442 80.558,72 78,72 ; 78,61 78,72 ; 96.234,104 129,104 129,90 130,90 130,87 130,66 129,66 129,61 96.234,61 96.234,104
  text "ESP RESET" at 108.454,102.531 h0.9
  text "POWER ON" at 82.727,93.109 h0.9
  text "CHARGING" at 73.12,73.624 h0.6
  text "POWER SWITCH" at 81.744,62.032 h0.9
Mechanical 1:
  the board outline again, w0.254

## Text inside footprints (layer, text, board x,y; h text height)
LED1: Top Overlay "K" at 114.666,65.803 h0.8 r180
LED2: Top Overlay "K" at 86.122,95.154 h0.8
LED3: Top Overlay "K" at 78.097,75.155 h0.8